# EAGLE board OBKP_Effector_PCB_MIKE_DID_IT (EAGLE 6.5.0)
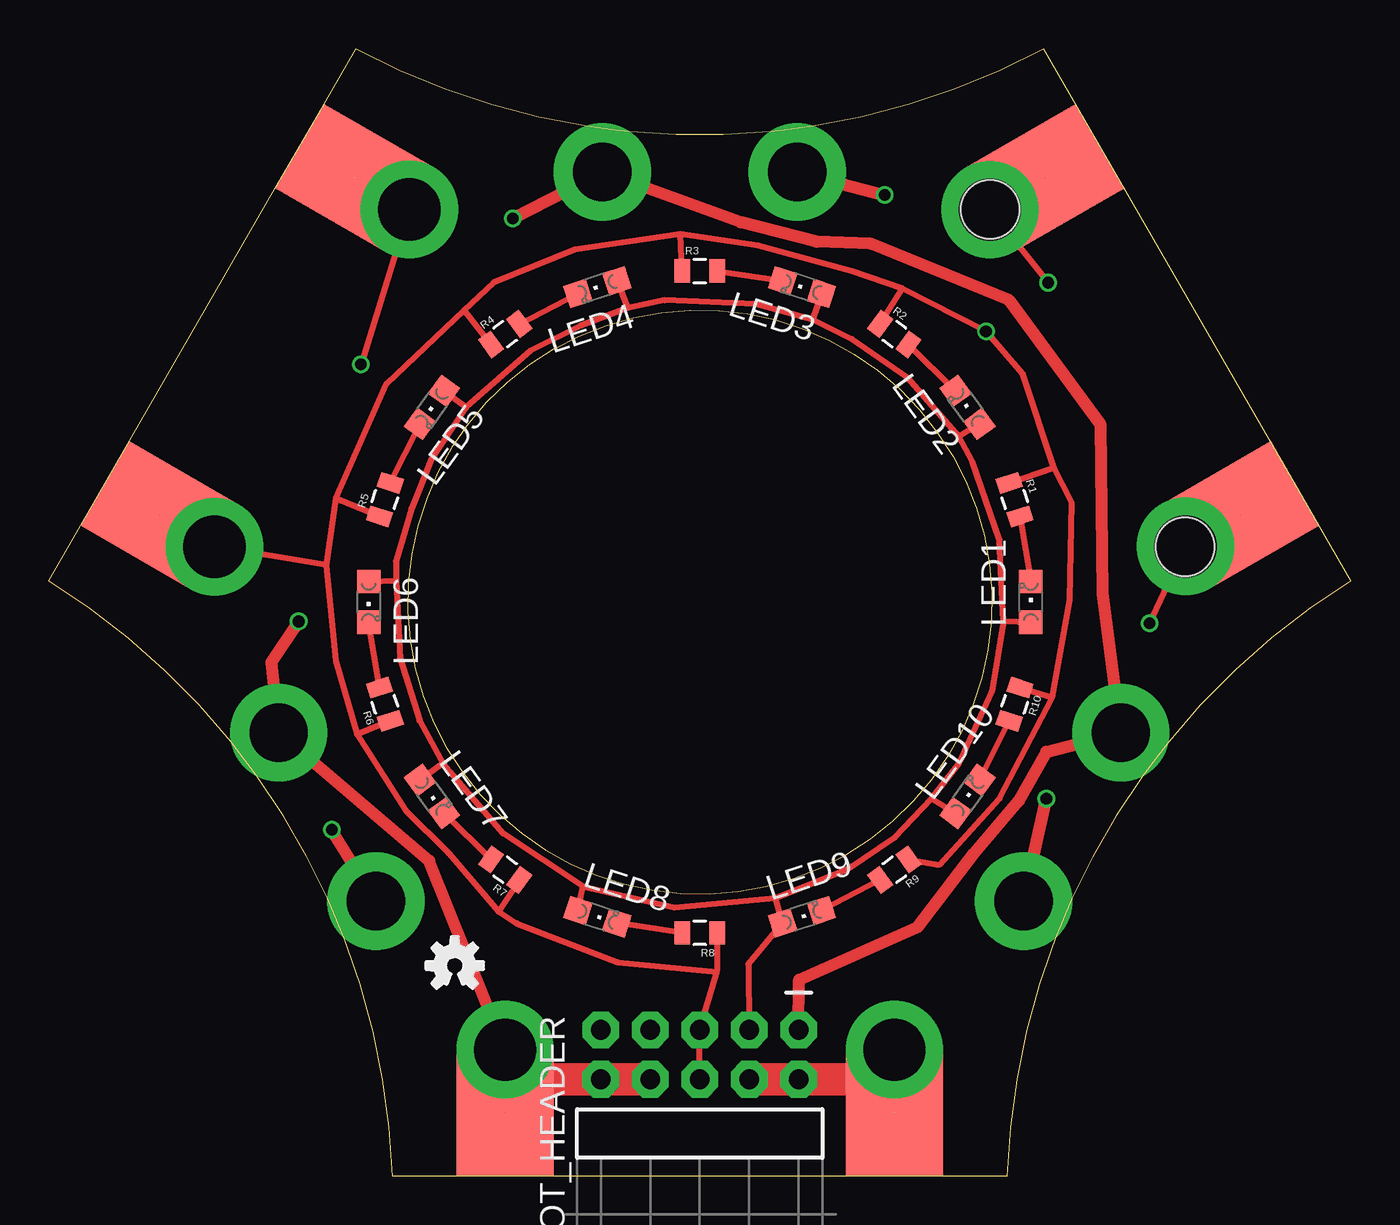
[diagram p0: board, top side]
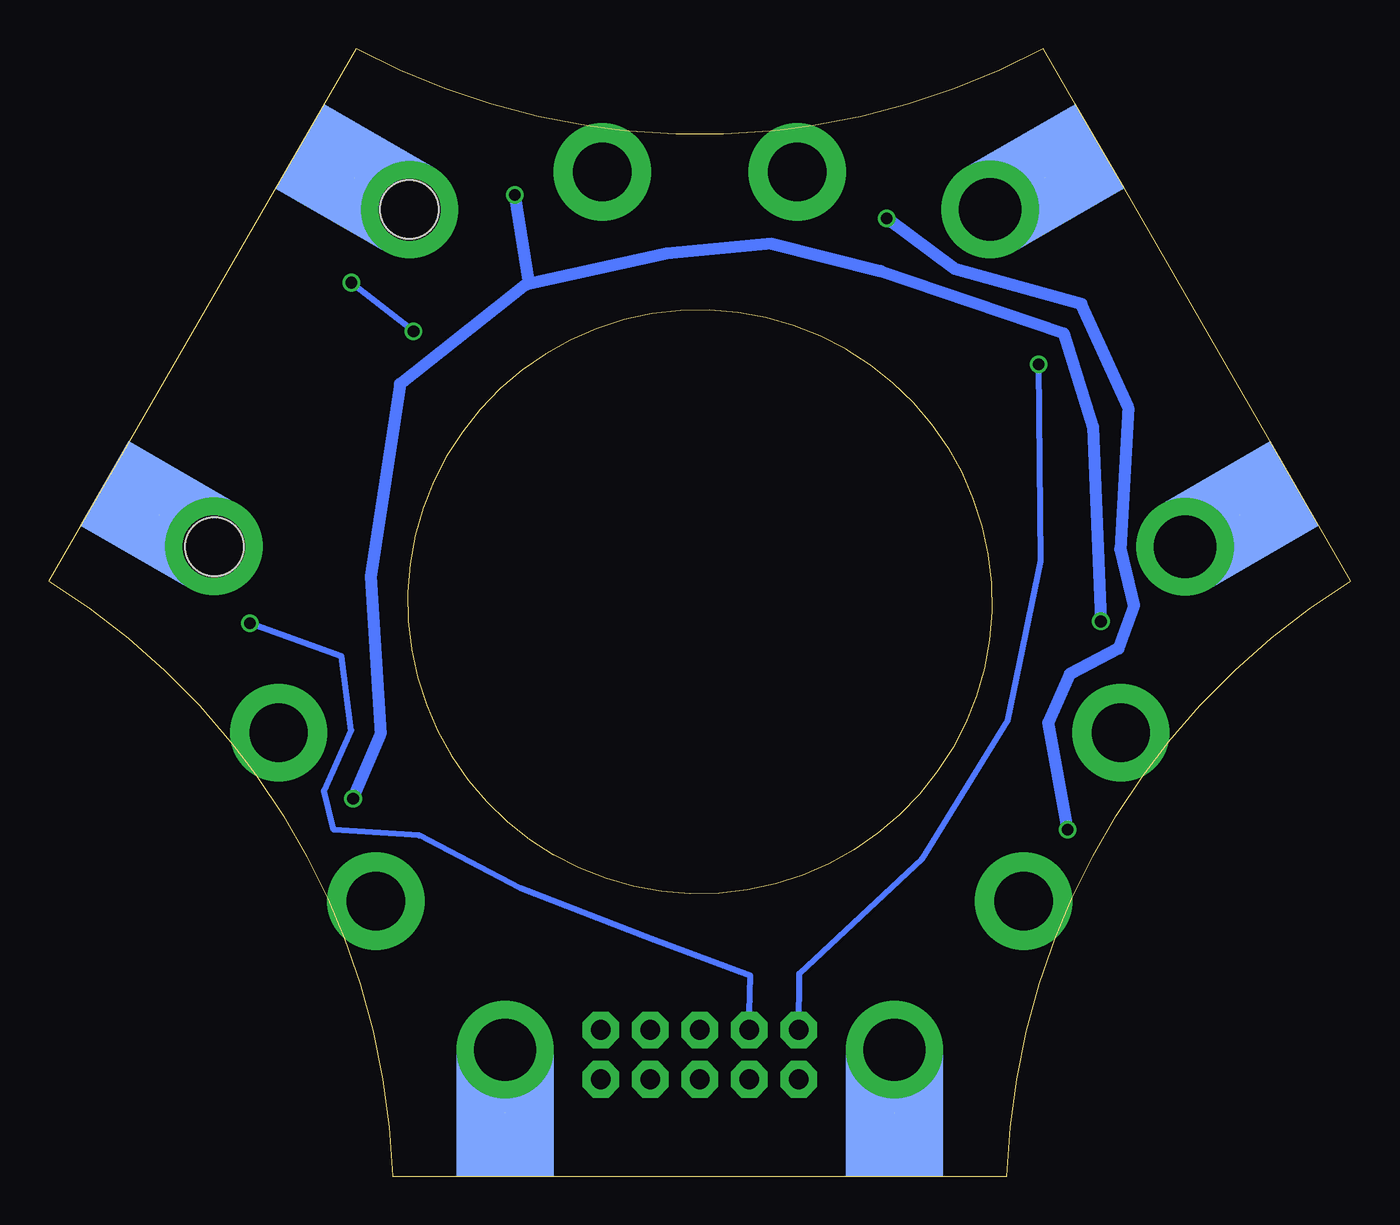
[diagram p1: board, bottom side, seen from below]

Size 66.88 x 57.92 mm. Coordinates in mm from the lower left corner, seen from the top.
Outline: 27.63,53.95 arc-19 15.78,57.92 14.14,55.08 11.64,50.74 1.64,33.42 0,30.58 arc-19 9.36,22.3 arc-3 10.69,20.56 arc-11 14.32,14.27 arc-3 15.17,12.25 arc-19 17.66,0 20.94,0 40.94,0 45.94,0 49.22,0 arc-19 51.71,12.25
Outline: 29.81,53.68 arc11 37.07,53.68
Outline: 27.63,53.95 arc3 29.81,53.68
Outline: 37.07,53.68 arc3 39.24,53.95 arc19 51.1,57.92 66.88,30.58 arc19 57.52,22.3 arc3 56.19,20.55 arc11 52.56,14.27 arc3 51.71,12.25
Outline: 25.94,42.49 arc180 40.94,16.51 arc180 25.94,42.49
Copper layers (1*2*15*16): Top 0.035mm / dielectric 0.2mm / layer 2 0.0175mm / dielectric 1.1mm / layer 15 0.0175mm / dielectric 0.2mm / Bottom 0.035mm
Design rules "SeeedStudio_DRU_no_angle_20130527 *": minimum track width 6mil, minimum drill 12mil, track to track 10mil, track to pad 10mil, pad to pad 10mil, via to via 10mil, smd to smd 0mil, copper to edge 10mil, drill to drill 10mil, minimum pad ring 6mil, minimum via ring 6mil, stop-mask expansion 2mil, vias tented up to drill 25mil, thermal gap 10mil
Net classes: 0 default: width 0.203 mm, drill 0.305 mm, clearance 0.203 mm; 1 high current: width 0.762 mm, drill 0.457 mm, clearance 0.203 mm
Holes 3 mm at 58.36,32.34 48.36,49.66

## Footprints (pad centres in the part's own frame; a part is rotated, then mirrored left to right if it is on the bottom)
2.3MM = drill 3 pad 5: P$1 0,0
2X5-RA = drill 1.016 pad 1.88 octagon: 1 -1.27,5.08; 2 1.27,5.08; 3 -1.27,2.54; 4 1.27,2.54; 5 -1.27,0; 6 1.27,0; 7 -1.27,-2.54; 8 1.27,-2.54; 9 -1.27,-5.08; 10 1.27,-5.08
3MM = drill 3.2 pad 5: P$1 0,0 | smd 5 x 6.5: P$2 0,-3.25 | smd 5 x 6.5 bottom: P$3 0,-3.25
CHIPLED_0805 = smd 1.2 x 1.2: A -1.05,0; C 1.05,0
0805 = smd 0.8 x 1.2: 1 -0.9,0; 2 0.9,0

## Placement (x,y rotation side)
FAN_0_PWM  LUG2.3  [2.3MM]  55.07,22.79 330 top
FAN_0_VCC  LUG2.3  [2.3MM]  38.44,51.59 0 top
FAN_1_PWM  LUG2.3  [2.3MM]  28.44,51.59 0 top
FAN_1_VCC  LUG2.3  [2.3MM]  50.07,14.13 330 top
FAN_2_PWM  LUG2.3  [2.3MM]  16.81,14.13 300 top
FAN_2_VCC  LUG2.3  [2.3MM]  11.81,22.79 300 top
HOT_HEADER  M05X2RA  [2X5-RA]  33.44,6.25 270 top
HOT_PWM  LUG3-X  [3MM]  43.44,6.5 0 top
HOT_VCC  LUG3-X  [3MM]  23.44,6.5 0 top
LED1  [CHIPLED_0805]  50.44,29.5 90 top
LED2  [CHIPLED_0805]  47.19,39.49 126 top
LED3  [CHIPLED_0805]  38.69,45.67 162 top
LED4  [CHIPLED_0805]  28.19,45.67 198 top
LED5  [CHIPLED_0805]  19.69,39.49 234 top
LED6  [CHIPLED_0805]  16.44,29.5 270 top
LED7  [CHIPLED_0805]  19.69,19.51 306 top
LED8  [CHIPLED_0805]  28.19,13.33 342 top
LED9  [CHIPLED_0805]  38.69,13.33 18 top
LED10  [CHIPLED_0805]  47.19,19.51 54 top
LOGO1  OSHW-LOGOS  [OSHW-LOGO-S]  20.85,10.82 0 top
PROBE+  LUG3-X  [3MM]  58.39,32.35 120 top
PROBE-  LUG3-X  [3MM]  48.34,49.65 120 top
R1  [0805]  49.61,34.75 288 top
R2  [0805]  43.43,43.25 324 top
R3  [0805]  33.44,46.5 0 top
R4  [0805]  23.45,43.25 36 top
R5  [0805]  17.27,34.75 72 top
R6  [0805]  17.27,24.25 108 top
R7  [0805]  23.45,15.75 144 top
R8  [0805]  33.44,12.5 180 top
R9  [0805]  43.43,15.75 216 top
R10  [0805]  49.61,24.25 252 top
THERM+  LUG3-X  [3MM]  18.52,49.66 240 top
THERM-  LUG3-X  [3MM]  8.52,32.34 240 top

## Library data of the parts
FAN_0_PWM FAN_0_VCC FAN_1_PWM FAN_1_VCC FAN_2_PWM FAN_2_VCC HOT_PWM HOT_VCC PROBE+ PROBE- THERM+ THERM- = OBKP_Effector_PCB
HOT_HEADER = SparkFun-Connectors
LED1-LED10 = SparkFun-LED
LOGO1 = SparkFun-Aesthetics
R1-R10 = SparkFun-Passives

## Nets
FAN_VCC: HOT_HEADER.3 LED1.A LED2.A LED3.A LED4.A LED5.A LED6.A LED7.A LED8.A LED9.A LED10.A
GND: HOT_HEADER.5 HOT_HEADER.6 PROBE-.P$1 PROBE-.P$2 PROBE-.P$3 R1.1 R2.1 R3.1 R4.1 R5.1 R6.1 R7.1 R8.1 R9.1 R10.1 THERM-.P$1 THERM-.P$2 THERM-.P$3
N$1: LED1.C R1.2
N$2: LED2.C R2.2
N$3: LED3.C R3.2
N$4: LED4.C R4.2
N$5: LED5.C R5.2
N$6: LED6.C R6.2
N$7: LED7.C R7.2
N$8: HOT_HEADER.2 HOT_HEADER.4 HOT_PWM.P$1 HOT_PWM.P$2 HOT_PWM.P$3
N$9: LED8.C R8.2
N$10: FAN_0_VCC.P$1 FAN_1_VCC.P$1 FAN_2_VCC.P$1 HOT_HEADER.8 HOT_HEADER.10 HOT_VCC.P$1 HOT_VCC.P$2 HOT_VCC.P$3
N$11: HOT_HEADER.9 THERM+.P$1 THERM+.P$2 THERM+.P$3
N$12: HOT_HEADER.7 PROBE+.P$1 PROBE+.P$2 PROBE+.P$3
N$13: LED9.C R9.2
N$14: LED10.C R10.2
N$17: FAN_0_PWM.P$1 FAN_1_PWM.P$1 FAN_2_PWM.P$1 HOT_HEADER.1

## Tracks (layer width: path | path; a pad name or v marks a point on that pad's centre or on a via)
FAN_VCC
  Top 0.305: HOT_HEADER.3 35.94,10.9 LED9.A 37.34,14.3 | 37.34,14.3 41.04,15.8 43.44,17.4 45.34,19.4 | 45.34,19.4 LED10.A | LED8.A 27.44,14.9 | 27.44,14.9 32.14,13.8 37.34,14.3 | 27.44,14.9 23.34,17.6 20.29,21.14 | 20.29,21.14 20.24,21.2 LED7.A | LED6.A 17.84,30.6 | 17.84,30.6 18.04,26.6 19.04,23.4 20.29,21.14 | LED5.A 21.44,39.5 | 21.44,39.5 19.64,36.8 18.64,34.3 17.84,31.6 17.84,30.6 | LED4.A 29.74,44.6 | 29.74,44.6 27.34,43.7 24.74,42.4 21.44,39.5 | LED3.A 39.24,44 | 39.24,44 36.34,44.8 31.64,45 29.74,44.6 | LED2.A 46.74,38 | 46.74,38 44.14,41 41.24,43 39.24,44 | LED1.A 49.04,28.5 | 49.04,28.5 48.44,24.9 46.74,21.2 45.34,19.4 | 49.04,28.5 48.84,32.7 47.44,36.7 46.74,38
GND  (via drill 0.6)  (2 unrouted)
  Top 0.2: THERM-.P$2 THERM-.P$1
  Top 0.305: HOT_HEADER.6 HOT_HEADER.5 34.31,10.51 | 34.31,10.51 34.34,10.6 R8.1 | R7.1 23.1,13.59 | 23.1,13.59 24.04,13 29.24,11 34.31,10.51 | R6.1 15.84,22.7 | 15.84,22.7 18.34,18.8 20.54,16.6 23.1,13.59 | R5.1 14.74,34.8 | 14.74,34.8 14.24,31.4 | 14.24,31.4 14.74,26.5 15.84,22.7 | R4.1 21.34,44.5 | 21.34,44.5 17.34,40.7 14.74,34.8 | R3.1 32.44,48.4 | 32.44,48.4 27.04,47.6 22.84,45.9 21.34,44.5 | R2.1 43.84,45.6 | 43.84,45.6 41.24,46.5 36.44,47.8 32.44,48.4 | R1.1 51.64,36.4 | 51.64,36.4 50.04,41.2 v48.14,43.4 43.84,45.6 | R10.1 51.54,24.6 | 51.54,24.6 52.44,29.6 52.54,34.6 51.64,36.4 | R9.1 45.74,16 48.84,19.4 51.54,24.6 | 14.24,31.4 THERM-.P$1 | v51.34,45.9 PROBE-.P$1 PROBE-.P$2
  Bottom 0.305: v48.14,43.4 v51.34,45.9
N$1
  Top 0.305: R1.2 LED1.C
N$2
  Top 0.305: R2.2 LED2.C
N$3
  Top 0.305: R3.2 LED3.C
N$4
  Top 0.305: R4.2 LED4.C
N$5
  Top 0.305: R5.2 LED5.C
N$6
  Top 0.305: R6.2 LED6.C
N$7
  Top 0.305: R7.2 LED7.C
N$8  (1 unrouted)
  Top 0.2: 41.92,4.98 43.54,6.5 HOT_PWM.P$3
  Top 1.676: HOT_PWM.P$1 41.92,4.98 HOT_HEADER.2 HOT_HEADER.4
N$9
  Top 0.305: R8.2 LED8.C
N$10  (via drill 0.6)  (1 unrouted)
  Top 0.2: 24.96,4.98 HOT_VCC.P$3
  Top 0.61: HOT_VCC.P$1 19.54,16.2 FAN_2_VCC.P$1 11.44,26.4 v12.84,28.5 | FAN_0_VCC.P$1 v42.94,50.4 | FAN_1_VCC.P$1 v51.24,19.4
  Top 1.676: HOT_VCC.P$1 24.96,4.98 HOT_HEADER.10 HOT_HEADER.8
  Bottom 0.61: v12.84,28.5 13.24,38.5 14.74,43.3 24.14,46.5 29.74,47.9 35.14,47.4 42.37,45.79 | v51.24,19.4 49.84,22.7 50.34,30.8 48.84,40.7 42.37,45.79 | 42.37,45.79 42.24,45.9 v42.94,50.4
N$11  (via drill 0.6)  (1 unrouted)
  Top 0.305: THERM+.P$2 THERM+.P$1 v16.04,41.7
  Bottom 0.305: v16.04,41.7 15.94,31.6 17.64,23.4 22.04,16.3 28.34,10.4 HOT_HEADER.9
N$12  (via drill 0.6)  (1 unrouted)
  Top 0.2: PROBE+.P$1 PROBE+.P$2
  Top 0.305: v56.54,28.4 PROBE+.P$1
  Bottom 0.305: HOT_HEADER.7 30.84,10.3 35.94,12.2 42.64,14.8 47.84,17.5 52.24,17.8 52.74,19.8 51.34,22.9 51.84,26.7 v56.54,28.4
N$13
  Top 0.305: R9.2 LED9.C
N$14
  Top 0.305: R10.2 LED10.C
N$17  (via drill 0.6)
  Top 0.61: HOT_HEADER.1 38.54,10.1 44.64,12.8 47.54,16.6 49.84,19.3 51.24,21.8 FAN_0_PWM.P$1 54.14,29.9 54.04,38.6 49.34,45 42.24,47.9 39.44,48 35.54,49 FAN_1_PWM.P$1 v23.84,49.2 | FAN_2_PWM.P$1 v14.54,17.8
  Bottom 0.61: v14.54,17.8 15.54,23.3 14.44,25.8 11.94,27.1 11.14,29.3 11.84,32.2 11.44,39.5 13.84,44.8 20.34,46.6 v23.84,49.2